# Altium PCB PCB.PcbDoc
Units mil, origin at the board's own origin, x right, y up, seen from the top; angles counter-clockwise.
Board outline 1615.03 x 1320.06 mil, 2 copper layers (Top Layer, Bottom Layer); 9 components, 7 nets, 21 pads, 1 vias.
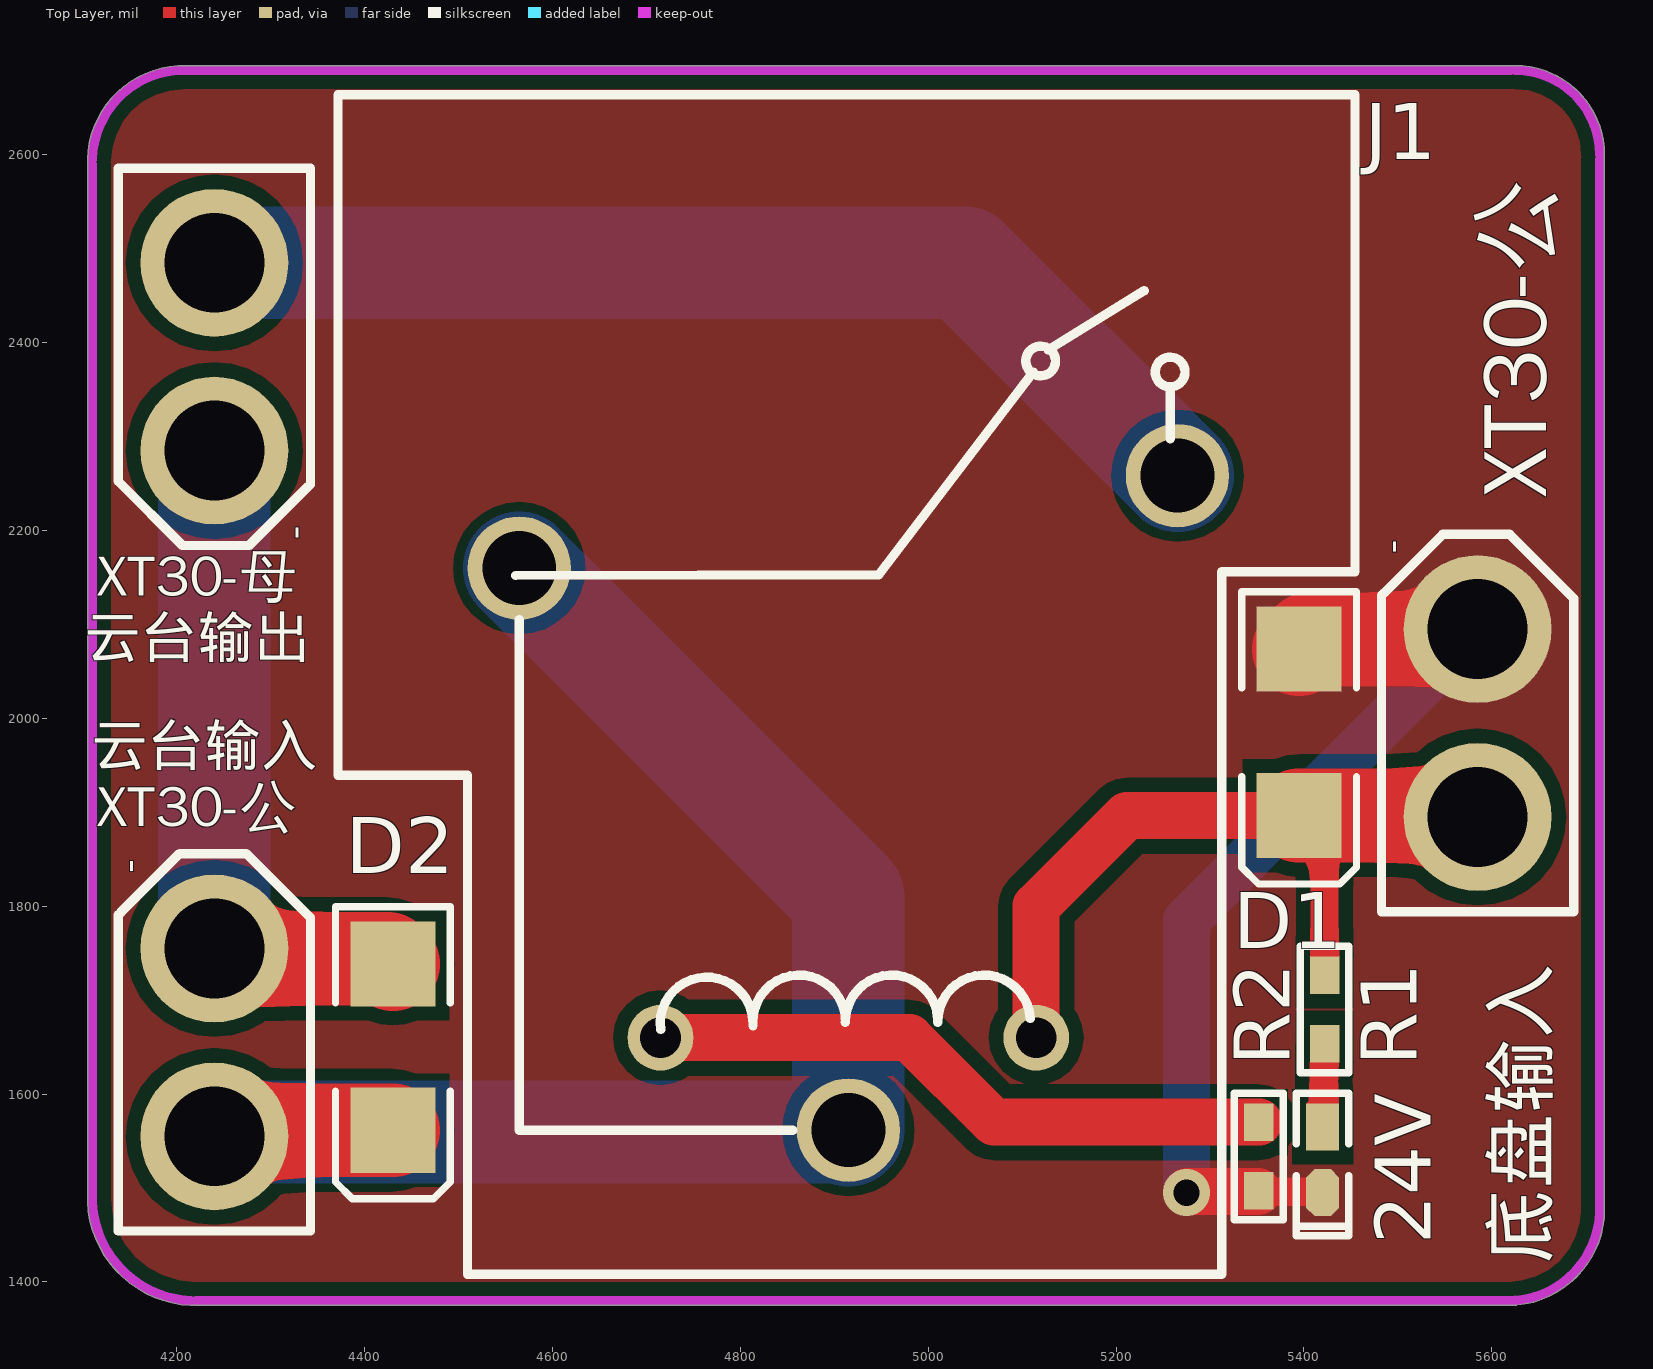
[diagram p0: Top Layer view]
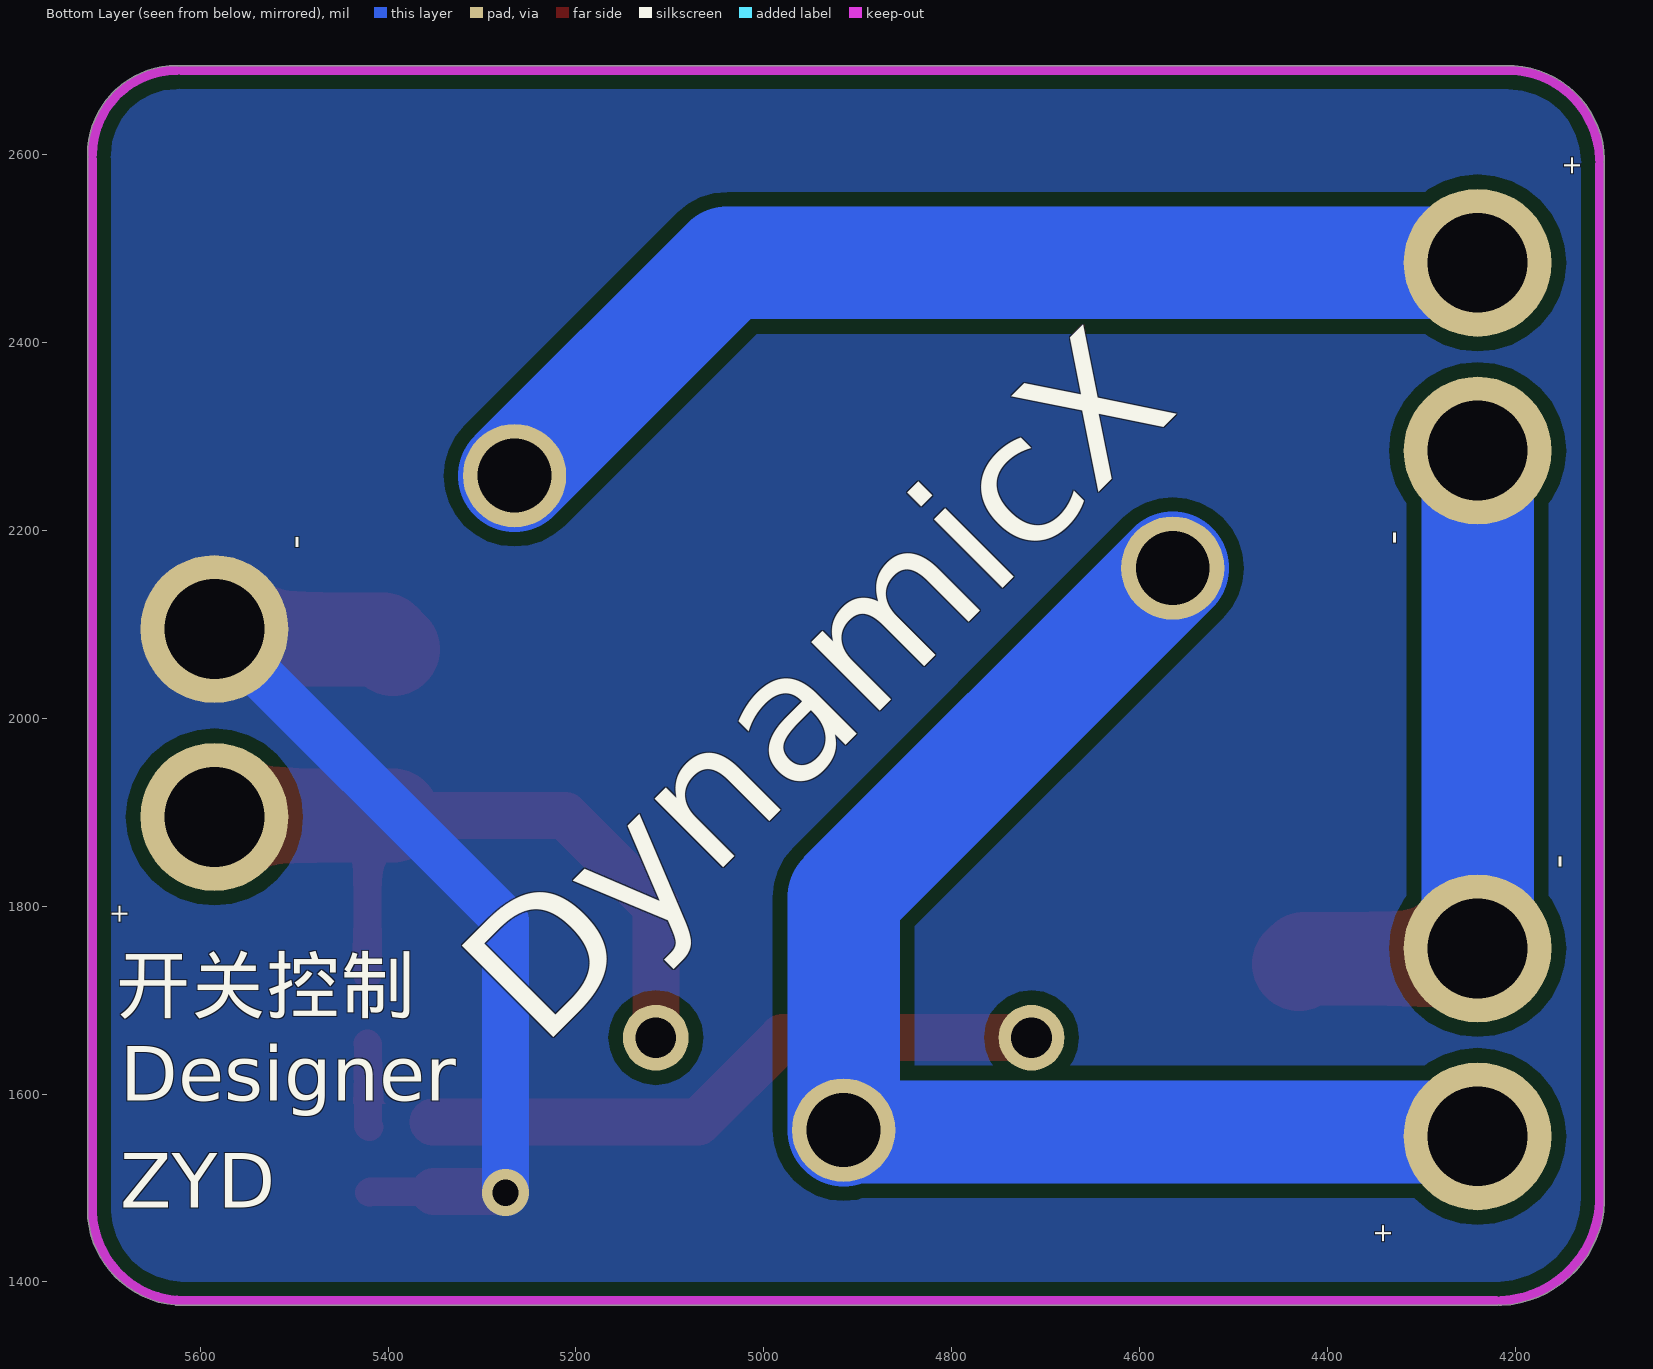
[diagram p1: Bottom Layer view, seen from below]
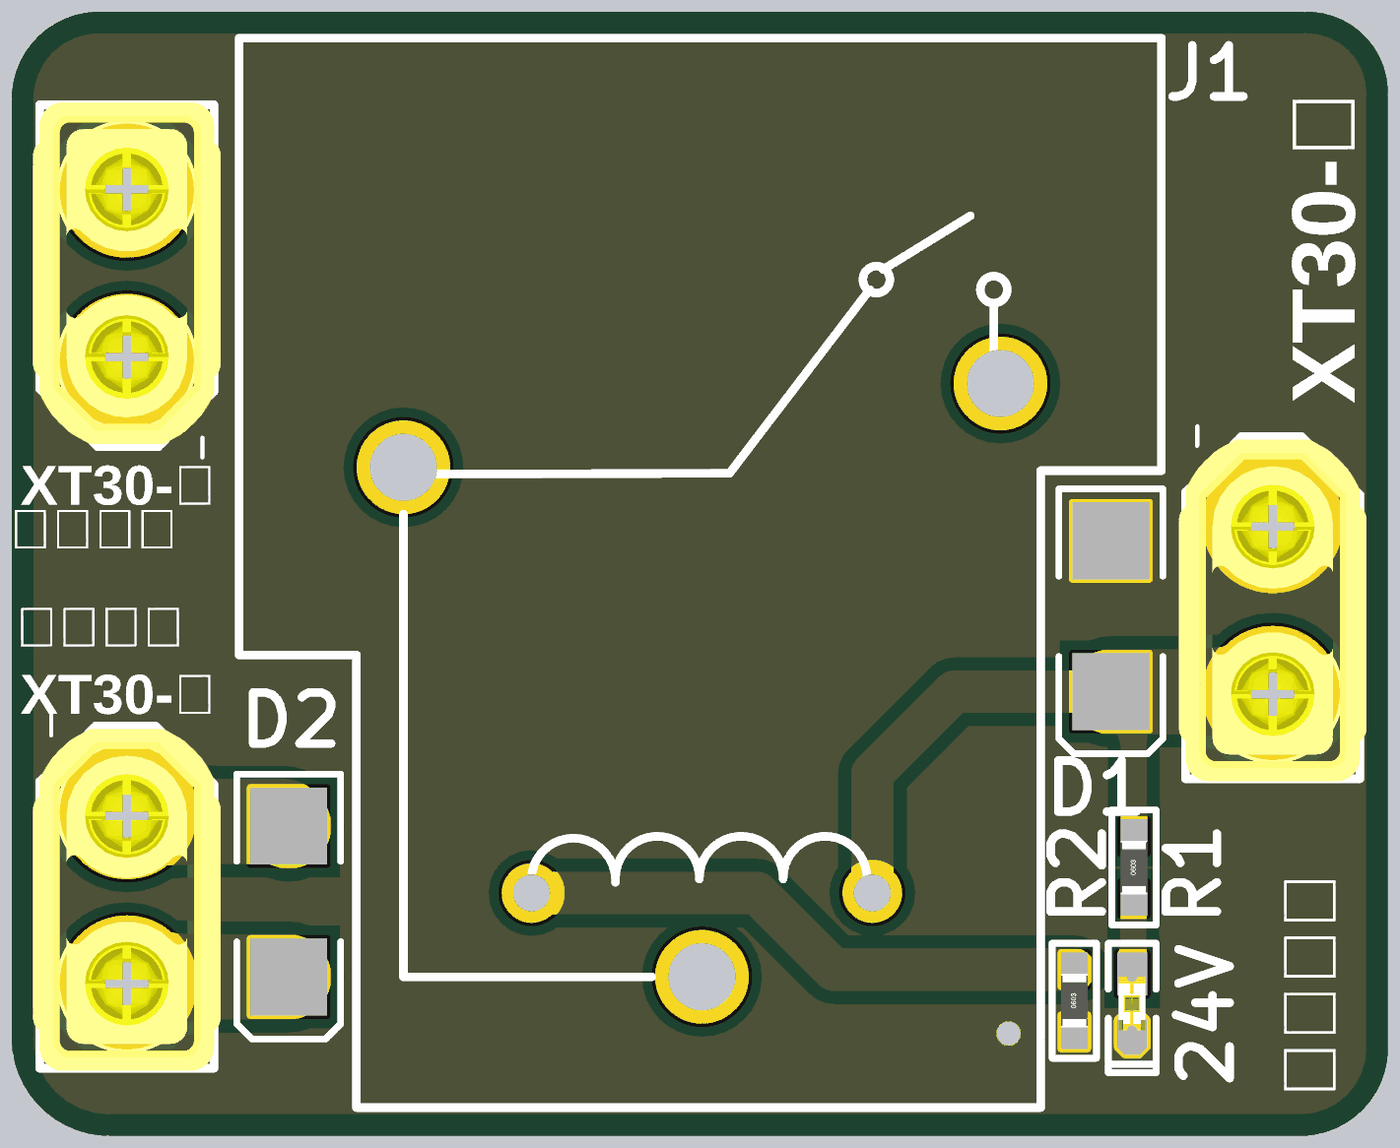
[diagram p2: 3D render of the assembled board from above, using the file's embedded part models]

## Layer stack, top to bottom
Top Solder: solder mask 0.4, Solder Resist, Dk 3.5
Top Layer: signal copper 1.4
Dielectric 1: dielectric 12.6, FR-4, Dk 4.8
Bottom Layer: signal copper 1.4
Bottom Solder: solder mask 0.4, Solder Resist, Dk 3.5

## Board outline
4214.77,1374.99 ccw(c4215,1380) 4217.5,1375.65 ccw(c4220,1380) 4220,1374.98 5614.93,1374.98 ccw(c5617.5,1477.5) 5620.07,1374.98 5625,1374.98 ccw(c5625,1380) 5626.98,1375.39 ccw(c5617.5,1477.5) 5719.61,1468.02 ccw(c5715,1470) 5720.02,1470 5720.02,2595 ccw(c5715,2595) 5719.35,2597.5 ccw(c5715,2600) 5720.02,2600 ccw(c5625,2600) 5625,2695.01 ccw(c5625,2690) 5622.5,2694.35 ccw(c5620,2690) 5620,2695.01 4210.06,2695.01 cw(c4207.5,2592.5) 4210.13,2695.01 4210.06,2695.01 ccw(c4207.5,2592.5) 4104.99,2595.13 ccw(c4110,2595) 4105.65,2592.5 ccw(c4110,2590) 4104.98,2590 4104.98,1495.11 ccw(c4220,1490)

## Design rules (kind name [scope] priority, off if disabled: settings)
Clearance [All] p1: gap=10 ignorepadtopadclearanceinfootprint=FALSE except(0: Arc-Hole Track-Hole SMDPad-Hole THPad-Hole Via-Hole Fill-Hole Poly-Hole Region-Hole Text-Hole; 15: Arc-Fill Arc-Poly Arc-Region Track-Fill Track-Poly Track-Region SMDPad-Fill SMDPad-Poly SMDPad-Region THPad-Fill THPad-Poly THPad-Region Via-Fill Via-Poly Via-Region Fill-Fill Fill-Poly Fill-Region Poly-Poly Poly-Region Region-Region)
PolygonConnect [All] p1: connectstyle=Direct reliefconductorwidth=10 reliefentries=4 polygonreliefangle="90 Angle" airgapwidth=10
RoutingVias [All] p1: holewidth=28 width=50 viastyle="Through Hole" minholewidth=28 minwidth=50 maxholewidth=28 maxwidth=50
SolderMaskExpansion [All] p1: expansion=4 istentingtop=FALSE
Width [All] p1: maxlimit=200 minlimit=10 preferedwidth=10
30 further rules are at their usual default settings.

## Components (designator, comment, footprint, x,y, rotation, side; value= is the part's Value field where it differs from the comment)
24V "红色" "LED 0603R" 5419.74,1530 r270 top (schematic designator LED1)
D1 "TVS/30V" SMB 5395,1985 r270 top
D2 "TVS/30V" SMB 4430,1650 r270 top
J1 "SL-A" RELAY-TH_SLA-XXVDC-SL-A 4915,1910 r0 top
R1 "10K" "R 0603" 5422,1690 r90 top
R2 "100R" "R 0603" 5352.08,1533.5 r90 top
云台输入 "云台电源输入" XT30-M 4295,1590 r90 top (schematic designator XT30-公*)
云台输出 "云台电源输出" XT30-M 4185,2450 r270 top (schematic designator XT30-母)
底盘输入 "底盘电源" XT30-M 5640,1930 r90 top (schematic designator XT30-公)

## Footprints (in the part's own frame and the unit in brackets; to place one, negate y for a bottom-side part, rotate by r counter-clockwise, add the part's x,y. Pads: shape width x height; smd on the part's side, far side on the other; paste and mask are expansions set on the pad)
"LED 0603R" [mil] "红色0603LED"
  rect 50x35 smd: 1(-35,0.26)
  oct 50x35 smd: 2(35,0.26)
  silkscreen extent -71,-28 81,28, body extent -31,-16 32,16, height 24
"R 0603" [mil] "1/10W贴片电阻"
  rect 40x31.5 smd: 1(-36.5,0) 2(36.5,0)
  silkscreen extent -68,-26 68,26, body extent -31,-16 32,16, height 16
RELAY-TH_SLA-XXVDC-SL-A [mil]
  round 110 hole 78.8: 2(350.39,348.41)
  round 70 hole 43.4: 3(200,-249.98) 4(-200,-249.98)
  round 110 hole 78.74: 5(-350.39,250.01) 5(0,-348.41)
  silkscreen extent -543,-502 539,754
SMB [mm] "DO-214-AA/SMB; 2 C-Bend Leads; Body 5.3 x 3.6 mm, inc. leads (LxW)"
  rect 2.3x2.3 smd: 1(-2.25,0) 2(2.25,0)
  silkscreen extent -3.8,-1.55 4.1,1.55
XT30-M [mm]
  round 4 hole 2.7: 1(-0.889,1.397) 2(4.191,1.397)
  silkscreen extent -3.45,-1.2 6.76,4, body extent -3.52,-1.4 6.67,4.2, height 10.66

## Part data
24V: library part LED-SMD, "贴片LED", BOM名称=贴片LED, 学习资源=www.ooocke.com, 版权归属=源创客
D1 D2: library part TVS, "TVS管"
J1: library part SLA-48VDC-SL-A, "SLA-48VDC-SL-A"
R1 R2: library part R, "贴片电阻", BOM名称=贴片电阻, 学习资源=www.ooocke.com, 版权归属=源创客
云台输入 云台输出 底盘输入: library part XT30

## Via types
v1: diameter 50, hole 28, Top Layer to Bottom Layer, tented both sides, 1 vias

## Nets (pads, with @x,y where several pads share a name; then routed paths per layer and width w, separated by ;. In a path a pad name is that pad's centre, name@x,y a point inside that pad or via, vN(x,y) a via of type N, cw(c..) or ccw(c..) an arc to the next point about the centre after c; other vN are vias at no path point)
24V: D1.2 J1.3 R1.2 底盘输入.1 | length 831.6
  Top Layer w30: D1.2 5422,1869.42 R1.2
  Top Layer w50: J1.3 5115,1800 5211.42,1896.42 D1.2
  Top Layer w100: D1.2 5583.58,1896.42 底盘输入.1
GND: 24V.2 D1.1 R2.1 底盘输入.2 | length 1074
  Top Layer w30: v1(5275,1495) v1@5276,1496 ; R2.1@5351.33,1496 R2.1@5352.08,1496.75 ; R2.1 R2.1@5352.08,1496.75 ; 24V.2 5419,1496 5352.83,1496 R2.1@5352.08,1496.75
  Top Layer w50: v1@5276,1496 R2.1@5351.33,1496
  Top Layer w100: D1.1 5405.42,2084 5574,2084 底盘输入.2
  Bottom Layer w50: v1(5275,1495) 5275,1785 底盘输入.2
NetD2_1: D2.1 云台输入.2 云台输出.2 | length 726.8
  Top Layer w100: 云台输入.2 4251,1744 4424.58,1744 D2.1
  Bottom Layer w120: 云台输入.2 云台输出.2
NetJ1_4: J1.4 R2.2 | length 674.4
  Top Layer w50: J1.4 4979.99,1660.02 5070,1570 R2.2
NetLED1_1: 24V.1 R1.1 | length 89.3
  Top Layer w30: 24V.1 5421.25,1566.25 5421.25,1652.75 R1.1
POWER_I: D2.2 J1.5 云台输入.1 | length 1614
  Top Layer w100: 云台输入.1 4246.42,1561.42 D2.2
  Bottom Layer w100: 云台输入.1 云台输入.1@4244.67,1559.67 ; J1.5@4913.09,1559.67 J1.5@4915,1561.59
  Bottom Layer w110: 云台输入.1@4244.67,1559.67 J1.5@4913.09,1559.67
  Bottom Layer w120: J1.5@4564.61,2160.01 4915,1809.62 J1.5@4915,1561.59
POWER_O: J1.2 云台输出.1 | length 1119.2
  Bottom Layer w120: 云台输出.1 5038.81,2485 J1.2

## Polygon pours and split planes (outlines as drawn)
GND on Top Layer "Top Layer-No Net" (solid, remove dead copper, pour order 0): 4214.77,1374.99 ccw(c4215,1380) 4217.5,1375.65 ccw(c4220,1380) 4220,1374.98 5614.93,1374.98 ccw(c5617.5,1477.5) 5620.07,1374.98 5625,1374.98 ccw(c5625,1380) 5626.98,1375.39 ccw(c5617.5,1477.5) 5719.61,1468.02 ccw(c5715,1470) 5720.02,1470 5720.02,2595 ccw(c5715,2595) 5719.35,2597.5 ccw(c5715,2600) 5720.02,2600 ccw(c5625,2600) 5625,2695.01 ccw(c5625,2690) 5622.5,2694.35 ccw(c5620,2690) 5620,2695.01 4210.06,2695.01 cw(c4207.5,2592.5) 4210.13,2695.01 4210.06,2695.01 ccw(c4207.5,2592.5) 4104.99,2595.13 ccw(c4110,2595) 4105.65,2592.5 ccw(c4110,2590) 4104.98,2590 4104.98,1495.11 ccw(c4220,1490)
GND on Bottom Layer "Top Layer-No Net1" (solid, remove dead copper, pour order 1): 4214.77,1374.99 ccw(c4215,1380) 4217.5,1375.65 ccw(c4220,1380) 4220,1374.98 5614.93,1374.98 ccw(c5617.5,1477.5) 5620.07,1374.98 5625,1374.98 ccw(c5625,1380) 5626.98,1375.39 ccw(c5617.5,1477.5) 5719.61,1468.02 ccw(c5715,1470) 5720.02,1470 5720.02,2595 ccw(c5715,2595) 5719.35,2597.5 ccw(c5715,2600) 5720.02,2600 ccw(c5625,2600) 5625,2695.01 ccw(c5625,2690) 5622.5,2694.35 ccw(c5620,2690) 5620,2695.01 4210.06,2695.01 cw(c4207.5,2592.5) 4210.13,2695.01 4210.06,2695.01 ccw(c4207.5,2592.5) 4104.99,2595.13 ccw(c4110,2595) 4105.65,2592.5 ccw(c4110,2590) 4104.98,2590 4104.98,1495.11 ccw(c4220,1490)

## Keep-outs
Keep-Out Layer:
  lines w10: 4110,1490 4110,2590 ; 4110,1495 ccw(c4220,1490) 4215,1380 ; 4110,2595 cw(c4207.5,2592.5) 4210,2690 5620,2690 ; 4220,1380 5625,1380 ; 5615,1380 ccw(c5617.5,1477.5) 5715,1475 ; 5625,2690 cw(c5625,2600) 5715,2600 ; 5715,1470 5715,2595

## Silkscreen, mask and mechanical layers (free items; w line width, h text height)
Top Overlay:
  text "XT30-公" at 5681,2235 h120 r90
  text "XT30-母" at 4115,2116.18 h75
  text "XT30-公" at 4115,1870.62 h75
Bottom Overlay:
  text "开关控制" at 5689.91,1668.6 h100
  text "DynamicX" at 5205,1615 h236.22 r315
  text "Designer" at 5685,1573.87 h100
  text "ZYD" at 5685,1460 h100
Bottom Solder:
  lines w100: 4240.33,1755.33 4240.33,2285.33 ; 4240.33,2485.33 5039.13,2485.33 5265.72,2258.74 ; 4245,1560 4913.41,1560 ; 4564.94,2160.34 4915.33,1809.95 4915.33,1561.91

## Text inside footprints (layer, text, board x,y; h text height)
云台输入: Top Overlay "-" at 4163,1835 h30 r90; Bottom Overlay "+" at 4349.24,1462.89 h20 r90; Bottom Overlay "-" at 4163,1855 h30 r90
云台输出: Top Overlay "-" at 4317,2205 h30 r270; Bottom Overlay "+" at 4130.76,2577.11 h20 r270; Bottom Overlay "-" at 4317,2185 h30 r270
底盘输入: Top Overlay "-" at 5508,2175 h30 r90; Bottom Overlay "+" at 5694.24,1802.89 h20 r90; Bottom Overlay "-" at 5508,2195 h30 r90